# Altium PCB PCB1.PcbDoc (part 2 of 2)
Units mil, origin at the board's own origin, x right, y up, seen from the top; angles counter-clockwise.
Board outline 3937.01 x 3937.01 mil, 4 copper layers (L1, L2, L3, L4), stack 61.811 mil thick; 100 components, 172 nets, 741 pads, 303 vias.
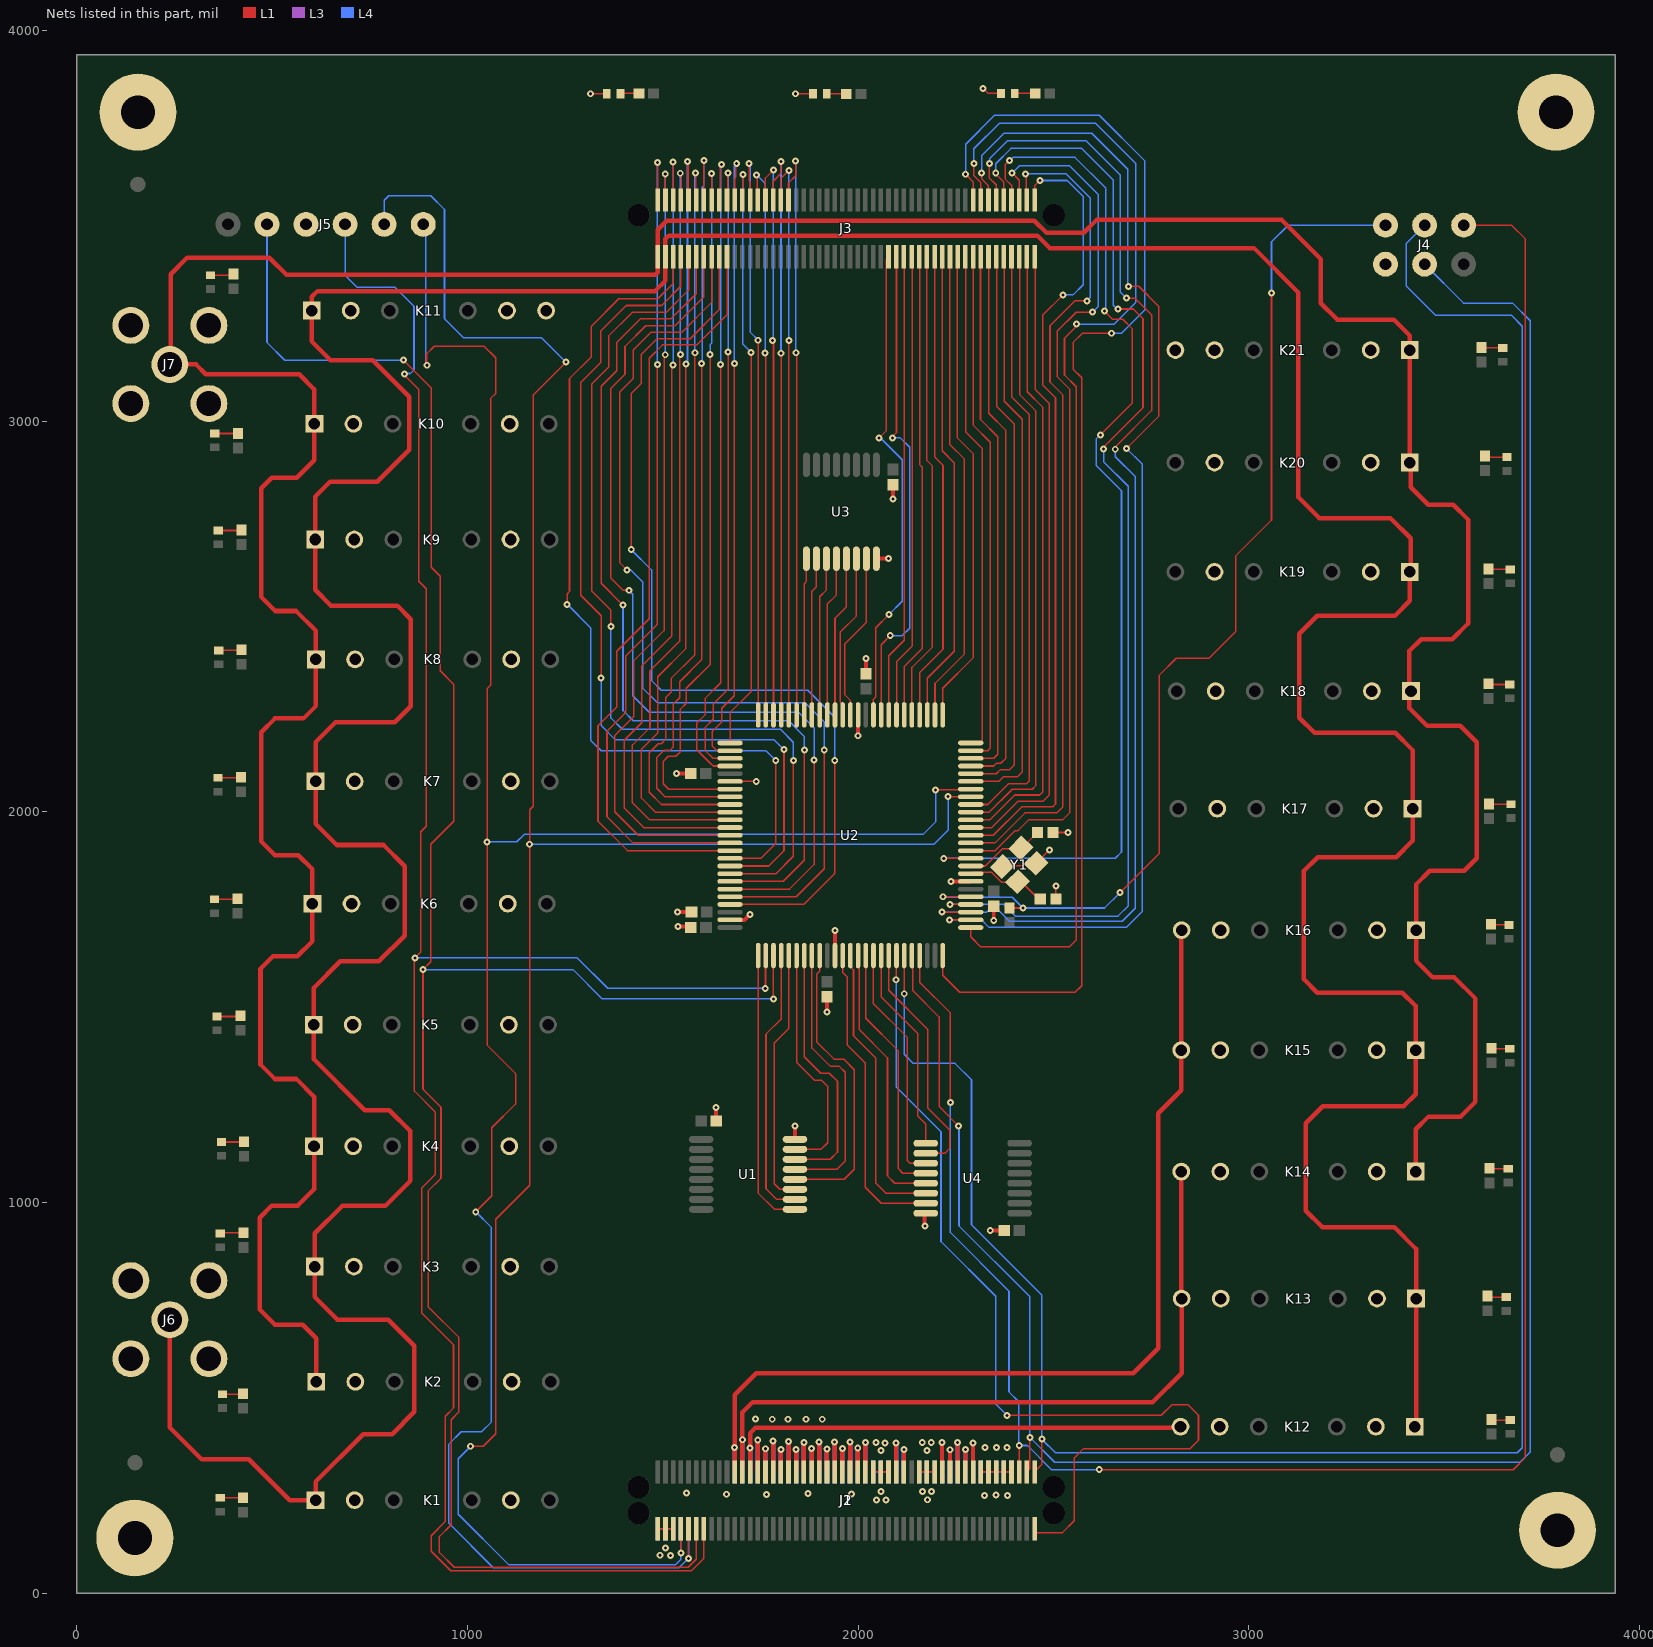
[diagram p4: the nets of this part, all layers, seen from the top]

## Via types
v1: diameter 17.72, hole 7.87, L1 to L4, 303 vias

## Nets (pads, with @x,y where several pads share a name; then routed paths per layer and width w, separated by ;. In a path a pad name is that pad's centre, name@x,y a point inside that pad or via, vN(x,y) a via of type N, cw(c..) or ccw(c..) an arc to the next point about the centre after c; other vN are vias at no path point) (continued)
GND: C1.1 C2.1 C3.1 C4.1 C5.1 C6.1 C7.1 C8.1 C9.1 C10.1 C11.1 D1.1 D2.1 D3.1 J1.2 J1.4 J1.6 J1.69 J1.71 J1.73 J1.85 J1.87 J1.89 J1.91 J1.93 J2.1 J2.3 J2.5 J2.70 J2.72 J2.74 J2.86 J2.88 J2.90 J2.92 J2.94 J4.6 J5.3 J6.2 J6.3 J6.4 J6.5 J7.2 J7.3 J7.4 J7.5 K1.5 K1.6 K2.5 K2.6 K3.5 K3.6 K4.5 K4.6 K5.5 K5.6 K6.5 K6.6 K7.5 K7.6 K8.5 K8.6 K9.5 K9.6 K10.5 K10.6 K11.4 K11.5 K11.6 K12.5 K12.6 K13.5 K13.6 K14.5 K14.6 K15.5 K15.6 K16.5 K16.6 K17.5 K17.6 K18.5 K18.6 K19.5 K19.6 K20.5 K20.6 K21.4 K21.5 K21.6 MH1.1 MH2.1 MH3.1 MH4.1 U1.8 U2.11 U2.32 U2.62 U2.81 U2.99 U3.8 U4.8 Y1.2 Y1.4 | length 1387.3
  L1 w4: v1(1315,3838) D1.1@1356,3838 ; J1.2@1486.97,164.84 J1.4@1506.65,164.84 J1.6@1526.34,164.84 ; C7.1@1636,1210 C7.1@1637,1209 ; U2.81@1671.93,2077.8 v1(1739,2077.8) ; v1(1839,3838) D2.1@1884.38,3838 ; J1.69@2156.26,310.51 J1.71@2175.94,310.51 J1.73@2195.63,310.51 ; v1(2171,940) 2172.92,941.92 v1@2172.92,947.08 ; J1.85@2313.74,310.51 J1.87@2333.43,310.51 J1.89@2353.11,310.51 J1.91@2372.8,310.51 J1.93@2392.48,310.51 ; v1(2319,3852) 2332,3839 D3.1@2365.57,3839 ; Y1.4@2369.03,1859.97 2370.42,1861.37 2420.57,1861.37 2427.53,1868.33 Y1.2@2455.33,1868.33 v1(2489.15,1902.15) ; C11.1@2499.16,1947 v1(2537,1947) ; v1(2506,1810) 2506.16,1809.84 C10.1@2506.16,1777
  L1 w10: v1(1535,2098) C5.1@1571,2098 ; v1(1537,1744) C3.1@1573.42,1744 ; v1(1539,1706) 1569.71,1706 C4.1@1571.71,1704 ; C7.1@1636,1210 v1(1636,1243) ; U2.99@1671.93,1723.46 1708.46,1723.46 1722,1737 v1(1723,1737) ; U1.8@1838.08,1161.57 v1(1838.08,1195.92) ; v1(1920,1488) C2.1@1920,1526.42 ; U2.11@1940.63,1631.93 v1(1940.63,1695.63) ; v1(1999.68,2194.68) U2.62@1999.68,2248.07 ; C6.1@2020,2353.58 v1(2020,2392) ; U3.8@2046.57,2647.92 v1(2077.92,2647.92) ; v1(2089,2801) C8.1@2089,2837.42 ; v1(2171,940) 2170,941 2170,968.87 2172.92,971.79 U4.8@2172.92,972.43 ; v1(2237.11,1821.89) U2.32@2288.07,1821.89 ; v1(2338,928) C9.1@2374,928 ; v1(2347,1721.58) C1.1@2347,1758
  L4 w4: J2.1@1486.97,164.84 J2.3@1506.65,164.84 J2.5@1526.34,164.84 ; J2.70@2156.26,310.51 J2.72@2175.94,310.51 J2.74@2195.63,310.51 ; J2.86@2313.74,310.51 J2.88@2333.43,310.51 J2.90@2353.11,310.51 J2.92@2372.8,310.51 J2.94@2392.48,310.51
  other v1: 1520,96 1493,97 1507,116 2177,239 2323,250 2382,250 2353,251 1765,252 1663,253 1983,254 1872,255 1560,256 2165,260 2188,260 2176,365 2325,373 2354,373 2381,373 2164,385 2187,385 1780,445 1820,445 1866,445 1908,445 1737,446
GPIO1: J3.20 U2.90 | length 2002.6
  L1 w4: J3.20@1665,3420.75 1665,3273 1587,3195 1499,3195 1465,3161 1465,2494 1382,2411 1382,2268 1334,2220 1334,1976 1409.37,1900.63 U2.90@1671.93,1900.63
GPIO2: J3.18 U2.97 | length 2458.3
  L1 w4: v1(1419,2671) 1419,3071 1445,3097 1445,3171 1485,3211 1570,3211 1644.45,3285.45 J3.18@1644.45,3420.75 ; U2.97@1671.93,1762.83 1860.83,1762.83 1940,1842 v1(1940,2131)
  L4 w4: v1(1419,2671) 1471,2619 1471,2336 1496,2311 1871,2311 1940,2242 v1(1940,2131)
GPIO3: J3.16 U2.96 | length 2424.9
  L1 w4: v1(1408,2619) 1390,2637 1390,3075 1424,3109 1424,3182 1469,3227 1548,3227 1624.76,3303.76 J3.16@1624.76,3420.75 ; U2.96@1671.93,1782.52 1841.52,1782.52 1913,1854 v1(1913,2158)
  L4 w4: v1(1408,2619) 1418,2619 1448,2589 1448,2317 1486,2279 1864,2279 1913,2230 v1(1913,2158)
GPIO4: J3.14 U2.95 | length 2387.3
  L1 w4: v1(1413,2567) 1398,2567 1367,2598 1367,3084 1403,3120 1403,3191 1456,3244 1531,3244 1605.08,3318.08 J3.14@1605.08,3420.75 ; U2.95@1671.93,1802.2 1824.2,1802.2 1887,1865 v1(1887,2133)
  L4 w4: v1(1413,2567) 1423,2557 1423,2297 1465,2255 1847,2255 1887,2215 v1(1887,2133)
GPIO5: J3.12 U2.94 | length 2352.3
  L1 w4: v1(1398,2529) 1342,2585 1342,3089 1382,3129 1382,3201 1443,3262 1521,3262 1585.39,3326.39 J3.12@1585.39,3420.75 ; U2.94@1671.93,1821.89 1807.89,1821.89 1862,1876 v1(1862,2158)
  L4 w4: v1(1398,2529) 1398,2259 1424,2233 1822,2233 1862,2193 v1(1862,2158)
GPIO6: J3.10 U2.93 | length 2319.8
  L1 w4: v1(1367,2474) 1367,2516 1318,2565 1318,3095 1361,3138 1361,3218 1422,3279 1509,3279 1565.71,3335.71 J3.10@1565.71,3420.75 ; U2.93@1671.93,1841.57 1789.57,1841.57 1834,1886 v1(1834,2131)
  L4 w4: v1(1367,2474) 1367,2240 1396,2211 1801,2211 1834,2178 v1(1834,2131)
GPIO7: J3.8 U2.92 | length 2287.4
  L1 w4: v1(1342,2342) 1342,2502 1290,2554 1290,3099 1341,3150 1341,3231 1406,3296 1497,3296 1546.02,3345.02 J3.8@1546.02,3420.75 ; U2.92@1671.93,1861.26 1771.26,1861.26 1810,1900 v1(1810,2159)
  L4 w4: v1(1342,2342) 1342,2221 1379,2184 1785,2184 v1(1810,2159)
GPIO8: J3.6 U2.91 | length 2273.9
  L1 w4: v1(1255,2531) 1255,2558 1261,2564 1261,3109 1317,3165 1317,3243 1387,3313 1487,3313 1526.34,3352.34 J3.6@1526.34,3420.75 ; U2.91@1671.93,1880.94 1750.94,1880.94 1789,1919 v1(1789,2131)
  L4 w4: v1(1255,2531) 1315,2471 1315,2183 1342,2156 1764,2156 v1(1789,2131)
GPIO9: J3.1 U2.89 | length 2167
  L1 w4: v1(1486,3145) 1486,2480 1405,2399 1405,2254 1357,2206 1357,1987 1423.69,1920.31 U2.89@1671.93,1920.31 ; v1(1486,3662) 1486.48,3661.52 1486.48,3566.9 J3.1@1486.97,3566.42
  L4 w4: v1(1486,3145) v1(1486,3662)
GPIO10: J3.3 U2.88 | length 2074.5
  L1 w4: v1(1506,3170) 1503,3167 1503,2464 1425,2386 1425,2243 1377,2195 1377,2000 1437,1940 U2.88@1671.93,1940 ; v1(1506,3633) 1506.33,3632.67 1506.33,3566.74 J3.3@1506.65,3566.42
  L4 w4: v1(1506,3633) v1(1506,3170) v1@1507,3171
GPIO11: J3.5 U2.87 | length 2093.3
  L1 w4: v1(1526,3144) 1523,3141 1523,2450 1446,2373 1446,2228 1401,2183 1401,2010 1451.32,1959.68 U2.87@1671.93,1959.68 ; v1(1526,3663) 1526.17,3662.83 1526.17,3566.59 J3.5@1526.34,3566.42
  L4 w4: v1(1526,3144) v1(1526,3663)
GPIO12: J3.7 U2.86 | length 2000.2
  L1 w4: v1(1544.51,3634.49) 1547.01,3631.99 1547.01,3567.41 J3.7@1546.02,3566.42 ; v1(1545,3171) 1543.14,3169.14 1543.14,2437.14 1467,2361 1467,2216 1422,2171 1422,2023 1465.63,1979.37 U2.86@1671.93,1979.37
  L4 w4: v1(1544.51,3634.49) 1544.51,3171.49 v1(1545,3171)
GPIO13: J3.9 U2.85 | length 2021.5
  L1 w4: v1(1559,3146) 1559,2418 1487,2346 1487,2202 1445,2160 1445,2035 1480.94,1999.06 U2.85@1671.93,1999.06 ; v1(1563,3665) 1564.35,3663.65 1564.35,3567.77 J3.9@1565.71,3566.42
  L4 w4: v1(1559,3146) 1563,3150 1561.62,3151.38 1561.62,3152.34 1563,3153.71 v1(1563,3665)
GPIO14: J3.11 U2.84 | length 1930.8
  L1 w4: v1(1582,3175) 1582,2402 1521,2341 1521,2306 1507,2292 1507,2185 1496,2174 1488,2174 1465,2151 1465,2050 1496.26,2018.74 U2.84@1671.93,2018.74 ; v1(1584,3635) 1584.7,3634.3 1584.7,3567.11 J3.11@1585.39,3566.42
  L4 w4: v1@1584,3177 v1(1582,3175) 1582,3633 v1(1584,3635)
GPIO15: J3.13 U2.83 | length 1964
  L1 w4: v1(1599,3147) 1599,2389 1543,2333 1543,2292 1526,2275 1526,2165 1518,2157 1502,2157 1484,2139 1484,2060 1505.57,2038.43 U2.83@1671.93,2038.43 ; v1(1605,3667) v1(1605,3667) 1605.04,3566.46 J3.13@1605.08,3566.42
  L4 w4: v1(1599,3147) 1601,3149 1601,3599 1605,3603 v1(1605,3667)
GPIO16: J3.15 U2.82 | length 1868.9
  L1 w4: v1(1621,3171) 1621,2377 1560,2316 1560,2278 1545,2263 1545,2154 1533,2142 1514,2142 1501,2129 1501,2072 1515,2058 1628,2058 1628.11,2058.11 U2.82@1671.93,2058.11 ; J3.15@1624.76,3566.42 1624.88,3566.54 1624.88,3633.88 v1(1625,3634)
  L4 w4: v1(1621,3171) 1621,3196 1625,3200 v1(1625,3634)
GPIO17: J3.17 U2.79 | length 1719.2
  L1 w4: J3.17@1644.45,3566.42 1647.38,3569.34 1647.38,3654.38 v1(1650,3657) ; v1(1648,3145) 1648,2330 1608,2290 1608,2248 1587,2227 1587,2159 1619,2127 1628.83,2117.17 U2.79@1671.93,2117.17
  L4 w4: v1(1648,3145) 1648,3655 v1(1650,3657)
GPIO18: J3.19 U2.78 | length 1644.5
  L1 w4: J3.19@1664.13,3566.42 1665.57,3567.85 1665.57,3633.57 v1(1667,3635) ; v1(1667,3177) 1667,2314 1629,2276 1629,2237 1608,2216 1608,2157 1628.15,2136.85 U2.78@1671.93,2136.85
  L4 w4: v1(1667,3177) v1(1667,3635)
GPIO19: J3.21 U2.77 | length 1661.9
  L1 w4: U2.77@1671.93,2156.54 1670.96,2157.51 1637.49,2157.51 1626,2169 1626,2205 1651,2230 1651,2265 1683,2297 v1(1683,3148) ; J3.21@1683.82,3566.42 1683.82,3621.82 1687,3625 1687,3657 v1(1689,3659)
  L4 w4: v1(1683,3148) 1683,3653 v1(1689,3659)
GPIO20: J3.23 U2.76 | length 1551.1
  L1 w4: U2.76@1671.93,2176.22 1671.93,2253.93 1726,2308 v1(1726,3176) ; J3.23@1703.5,3566.42 1704.25,3567.17 1704.25,3630.25 v1(1705,3631)
  L4 w4: v1(1705,3631) 1705,3197 v1(1726,3176)
GPIO21: J3.25 U2.75 | length 1514.9
  L1 w4: v1(1720,3659) 1720.86,3658.14 1720.86,3615.14 1723.19,3612.81 J3.25@1723.19,3566.42 ; U2.75@1743.78,2248.07 1743.78,3206.78 v1(1744,3207)
  L4 w4: v1(1720,3659) 1720,3655.29 1724,3651.29 1724,3227 v1(1744,3207)
GPIO22: J3.27 U2.74 | length 1458.1
  L1 w4: v1(1740,3630) 1741.44,3628.56 1741.44,3567.85 J3.27@1742.87,3566.42 ; v1(1761,3174) 1763.46,3171.54 U2.74@1763.46,2248.07
  L4 w4: v1(1740,3630) 1762,3608 1762,3177 1763,3176 v1(1761,3174)
GPIO23: J3.29 U2.73 | length 1482.5
  L1 w4: J3.29@1762.56,3566.42 1762.56,3622.56 v1(1783,3643) ; v1(1781,3206) 1783.15,3203.85 U2.73@1783.15,2248.07
  L4 w4: v1(1781,3206) 1783,3208 1782,3209 1782,3642 v1(1783,3643)
GPIO24: J3.31 U2.72 | length 1524.4
  L1 w4: J3.31@1782.24,3566.42 1782.24,3614.24 1802,3634 v1(1802,3665) ; U2.72@1802.83,2248.07 v1(1802.83,3173.83)
  L4 w4: v1(1802,3665) 1802.42,3664.58 1802.42,3175.09 1802,3174.67 v1(1802.83,3173.83)
GPIO25: J3.33 U2.71 | length 1478.2
  L1 w4: J3.33@1801.93,3566.42 1801.93,3620.89 1820.52,3639.48 1822.52,3639.52 v1(1822.52,3641.48) ; U2.71@1822.52,2248.07 v1(1822.52,3206.48)
  L4 w4: v1(1822.52,3206.48) v1(1822.52,3641.48)
GPIO26: J3.35 U2.70 | length 1526.5
  L1 w4: J3.35@1821.61,3566.42 1821.61,3609.61 1840,3628 v1(1840,3666) ; v1(1841,3175) 1842.2,3173.8 U2.70@1842.2,2248.07
  L4 w4: v1(1840,3666) 1840.5,3665.5 1840.5,3176.5 1840,3176 v1(1841,3175)
GPIO27: J3.62 U2.60 | length 1240.9
  L1 w4: U2.60@2039.06,2248.07 2039.06,2288.06 2045,2294 2045,2471 v1(2079,2505) ; v1(2053,2957) 2072.14,2976.14 2072.14,3414.89 J3.62@2078,3420.75
  L4 w4: v1(2053,2957) 2056.71,2957 2061.22,2952.49 2061.51,2952.49 2113,2901 2113,2539 v1(2079,2505)
GPIO28: J3.64 U2.59 | length 1255.3
  L1 w4: U2.59@2058.74,2248.07 2058.74,2427.74 v1(2082,2451) ; v1(2088,2957) 2088,2960.71 2098,2970.71 J3.64@2098,3420.75
  L4 w4: v1(2082,2451) 2113,2451 2132,2470 2132,2933 2108,2957 v1(2088,2957)
GPIO29: J3.66 U2.58 | length 1189.1
  L1 w4: U2.58@2078.43,2248.07 2078.43,2399.43 2118,2439 J3.66@2118,3420.75
GPIO30: J3.68 U2.57 | length 1189.2
  L1 w4: U2.57@2098.11,2248.07 2098.11,2384.11 2138,2424 J3.68@2138,3420.75
GPIO31: J3.70 U2.56 | length 1194.7
  L1 w4: U2.56@2117.8,2248.07 2117.8,2371.8 2164,2418 2164,2882 2157,2889 J3.70@2157,3420.75
GPIO32: J3.72 U2.55 | length 1200.2
  L1 w4: U2.55@2137.48,2248.07 2137.48,2369.48 2190,2422 2190,2885 2176,2899 J3.72@2176,3420.75
GPIO33: J3.74 U2.54 | length 1206.2
  L1 w4: U2.54@2157.17,2248.07 2157.17,2356.17 2217,2416 2217,2887 2196,2908 J3.74@2196,3420.75
GPIO34: J3.76 U2.53 | length 1214.2
  L1 w4: U2.53@2176.85,2248.07 2176.85,2341.85 2246,2411 2246,2893 2215,2924 J3.76@2215,3420.75
GPIO35: J3.78 U2.52 | length 1219.7
  L1 w4: U2.52@2196.54,2248.07 2196.54,2328.54 2272,2404 2272,2903 2234,2941 J3.78@2234,3420.75
GPIO36: J3.80 U2.51 | length 1222.3
  L1 w4: U2.51@2216.22,2248.07 2216.22,2316.22 2295,2395 2295,2916 2254,2957 J3.80@2254,3420.75
GPIO37: J3.82 U2.50 | length 1289.1
  L1 w4: J3.82@2275,3420.75 2275,2972 2318,2929 2318,2181.69 2312.53,2176.22 U2.50@2288.07,2176.22
GPIO38: J3.84 U2.49 | length 1328.6
  L1 w4: U2.49@2288.07,2156.54 2331.54,2156.54 2338,2163 2338,2946 2294,2990 J3.84@2294,3420.75
GPIO39: J3.86 U2.48 | length 1365.1
  L1 w4: U2.48@2288.07,2136.85 2346.85,2136.85 2357,2147 2357,2960 2313,3004 J3.86@2313,3420.75
GPIO40: J3.88 U2.47 | length 1400.1
  L1 w4: U2.47@2288.07,2117.17 2347.17,2117.17 2354,2124 2365,2124 2378,2137 2378,2976 2334,3020 J3.88@2334,3420.75
GPIO41: J3.90 U2.46 | length 1439.8
  L1 w4: U2.46@2288.07,2097.48 2353.48,2097.48 2364,2108 2388,2108 2399,2119 2399,2993 2355,3037 J3.90@2355,3420.75
GPIO42: J3.92 U2.45 | length 1479.8
  L1 w4: U2.45@2288.07,2077.8 2359.8,2077.8 2372,2090 2408,2090 2420,2102 2420,3005 2374,3051 J3.92@2374,3420.75
GPIO43: J3.94 U2.42 | length 1535.3
  L1 w4: U2.42@2288.07,2018.74 2331.74,2018.74 2385,2072 2431,2072 2438,2079 2438,3017 2393,3062 J3.94@2393,3420.75
GPIO44: J3.96 U2.41 | length 1565.9
  L1 w4: U2.41@2288.07,1999.06 2335.06,1999.06 2394,2058 2445.5,2058 2455,2067.5 2455,3026 2413,3068 J3.96@2413,3420.75
GPIO45: J3.98 U2.40 | length 1600.1
  L1 w4: U2.40@2288.07,1979.37 2337.37,1979.37 2401,2043 2465,2043 2472,2050 2472,3036 2433,3075 J3.98@2433,3420.75
GPIO46: J3.100 U2.39 | length 1628.1
  L1 w4: U2.39@2288.07,1959.68 2341.68,1959.68 2409,2027 2473,2027 2489,2043 2489,3045 2453,3081 J3.100@2453,3420.75
GPIO47: J3.99 U2.38 | length 2060.2
  L1 w4: U2.38@2288.07,1940 2346,1940 2419,2013 2498,2013 2505,2020 2505,3060 2472,3093 2472,3271 v1(2524,3323) ; J3.99@2451.54,3566.42 2451.54,3602.54 v1(2465,3616)
  L4 w4: v1(2465,3616) 2535,3616 2576,3575 2576,3349 2550,3323 v1(2524,3323)
GPIO48: J3.97 U2.37 | length 2166.3
  L1 w4: U2.37@2288.07,1920.31 2350.31,1920.31 2427,1997 2508,1997 2524,2013 2524,3067 2491,3100 2491,3244 2555,3308 v1(2585.34,3308) ; v1(2428,3633) 2429.93,3631.07 2429.93,3568.34 J3.97@2431.85,3566.42
  L4 w4: v1(2428,3633) 2532,3633 2594,3571 2594,3317.04 2585.34,3308.39 v1(2585.34,3308)
GPIO49: J3.95 U2.36 | length 2292.4
  L1 w4: U2.36@2288.07,1900.63 2350.63,1900.63 2402,1952 2409,1952 2437,1980 2524,1980 2541,1997 2541,3082 2509,3114 2509,3230 2558,3279 v1(2600,3279) ; v1(2394,3635) 2412.17,3616.83 J3.95@2412.17,3566.42
  L4 w4: v1(2394,3635) 2413,3654 2541,3654 2614,3581 2614,3293 v1(2600,3279)
GPIO50: J3.93 U2.35 | length 2735.9
  L1 w4: v1(2219.06,1880.94) U2.35@2288.07,1880.94 ; v1(2387,3667) 2376,3656 2376,3620 2392.48,3603.52 J3.93@2392.48,3566.42 ; v1(2620,2965) 2701,3046 2701,3237 2677,3261 2651,3261 v1(2630,3282)
  L4 w4: v1(2219.06,1880.94) 2657.94,1880.94 2674,1897 2674,2822 2609,2887 2609,2954 v1(2620,2965) ; v1(2387,3667) 2388.2,3667 2396.2,3675 2555,3675 2634,3596 2634,3289.71 2630,3285.71 v1(2630,3282)
GPIO51: J3.91 U2.29 | length 2966
  L1 w4: v1(2234.83,1762.83) U2.29@2288.07,1762.83 ; v1(2352,3635) 2352,3632.69 2372.8,3611.89 J3.91@2372.8,3566.42 ; v1(2628,2929) 2628,2932.71 2632.51,2937.22 2632.51,2937.51 2729,3034 2729,3262 2704,3287 v1(2665,3287)
  L4 w4: v1(2234.83,1762.83) 2372.17,1762.83 2402,1733 2665,1733 2691,1759 2691,2833 2628,2896 v1(2628,2929) ; v1(2352,3635) 2352,3659 2391,3698 2572,3698 2653,3617 2653,3296.7 2662.7,3287 v1(2665,3287)
GPIO52: J3.89 U2.28 | length 3083.5
  L1 w4: v1(2214.15,1743.15) U2.28@2288.07,1743.15 ; v1(2336,3660) 2336,3622 2353.11,3604.89 J3.89@2353.11,3566.42 ; v1(2658,2928) 2660.62,2930.62 2660.62,2936.62 2751,3027 2751,3272 2708,3315 v1(2686.24,3315)
  L4 w4: v1(2214.15,1743.15) 2214.3,1743 2214.45,1743.15 2328.15,1743.15 2335,1750 2357,1750 2387,1720 2676,1720 2709,1753 2709,2858 2658,2909 v1(2658,2928) ; v1(2336,3660) 2336.51,3660.51 2336.51,3672.51 2382,3718 2583,3718 2671,3630 2671,3330.24 v1(2686.24,3315)
GPIO53: J3.87 U2.27 | length 3128.4
  L1 w4: v1(2233.46,1723.46) U2.27@2288.07,1723.46 ; v1(2316,3635) 2316,3620 2333.43,3602.57 J3.87@2333.43,3566.42 ; v1(2687,2930) 2769,3012 2769,3294 2718,3345 v1(2691.66,3345)
  L4 w4: v1(2233.46,1723.46) 2315.54,1723.46 2335,1704 2686,1704 2727,1745 2727,2890 v1(2687,2930) ; v1(2316,3635) 2316,3680 2373,3737 2598,3737 2690,3645 2690,3346.66 v1(2691.66,3345)
GPIO54: J3.85 U2.26 | length 3066.2
  L1 w4: U2.26@2288.07,1703.78 2288.07,1679.93 2314,1654 2540,1654 2558,1672 2558,3088 2528,3118 2528,3212 2559,3243 v1(2559,3248.5) ; v1(2296,3660) 2296,3628.69 2313.74,3610.95 J3.85@2313.74,3566.42
  L4 w4: v1(2296,3660) 2296,3697 2362,3763 2607,3763 2710,3660 2710,3303 2655.5,3248.5 v1(2559,3248.5)
GPIO55: J3.83 U2.25 | length 3374.6
  L1 w4: U2.25@2216.22,1631.93 2216.22,1581.78 2260,1538 2555,1538 2572,1555 2572,3111 2550,3133 2550,3201 2574,3225 v1(2648,3225) ; v1(2275,3632) 2294.06,3612.94 J3.83@2294.06,3566.42
  L4 w4: v1(2275,3632) 2275,3709 2349,3783 2617,3783 2734,3666 2734,3285 2674,3225 v1(2648,3225)
H: J1.21 J2.22 K15.4 K16.4 | length 2488
  L1 w4: K15.4@2827,1390 K15.4@2827.5,1390.5 ; K16.4@2827.5,1696.5 K16.4@2828,1697
  L1 w11.55: J1.21@1683.82,310.51 v1(1683.82,372.82) 1683.82,507.82 1739,563 2704,563 2768,627 2768,1228 2827,1287 K15.4@2827,1390 ; K15.4@2827.5,1390.5 K16.4@2827.5,1696.5
  L4 w11.55: J2.22@1683.82,310.51 v1(1683.82,372.82)
I: J1.23 J2.24 K13.4 K14.4 | length 1916.5
  L1 w4: K14.4@2827,1079 K14.4@2827.5,1078.5 ; K13.4@2827.5,754.5 K13.4@2828,754
  L1 w11.55: J1.23@1703.5,310.51 v1(1703.5,392.5) 1703.5,462.5 1730,489 2754,489 2828,563 K13.4@2828,754 ; K13.4@2827.5,754.5 K14.4@2827.5,1078.5
  L4 w11.55: J2.24@1703.5,310.51 v1(1703.5,392.5)
J: J1.25 J2.26 K12.4 | length 1277.2
  L1 w4: K12.4@2819,420 K12.4@2825,426
  L1 w11.55: J1.25@1723.19,310.51 v1(1723.19,371.81) 1723.19,409.19 1737,423 2822,423 K12.4@2825,426
  L4 w11.55: J2.26@1723.19,310.51 v1(1723.19,371.81)
K: J1.27 J2.28 | length 162.7
  L1 w11.55: J1.27@1742.87,310.51 v1(1742.87,391.87)
  L4 w11.55: J2.28@1742.87,310.51 v1(1742.87,391.87)
L: J1.29 J2.30 | length 117.9
  L1 w11.55: J1.29@1762.56,310.51 v1(1762.56,369.44)
  L4 w11.55: J2.30@1762.56,310.51 v1(1762.56,369.44)
M: J1.31 J2.32 | length 160.2
  L1 w4: J1.31@1781,311.76 J1.31@1782.24,310.51
  L1 w11.55: J1.31@1782.24,310.51 v1(1782.24,389.76)
  L4 w11.55: J2.32@1782.24,310.51 v1(1782.24,389.76)
MISO: J1.95 J4.1 U2.22 | length 6053.2
  L1 w4: U2.22@2157.17,1631.93 2157.17,1563.83 2236,1485 v1(2236,1256) ; J1.95@2412.17,310.51 v1(2412.17,377.83) ; v1(2617,316) 3677,316 3708,347 3708,3466 3672.31,3501.69 J4.1@3549.92,3501.69
  L4 w4: v1(2236,1256) 2236,923 2386,773 2386,515 2411,490 2411,379 v1(2412.17,377.83) 2433.17,377.83 2495,316 v1(2617,316)
MOSI: J1.97 J4.4 U2.21 | length 5993
  L1 w4: U2.21@2137.48,1631.93 2138.97,1630.43 2138.97,1600.13 2140,1599.11 2140,1542 2207,1475 2207,1246 v1(2257,1196) ; J1.97@2431.85,310.51 2439.63,318.29 v1(2439.63,398.63)
  L4 w4: v1@2258,1196 2258,940 2439.63,758.37 2439.63,398.37 2503,335 3694,335 3720,361 3720,3257 3674.72,3302.28 3549.33,3302.28 J4.4@3449.92,3401.69
N: J1.33 J2.34 | length 114.8
  L1 w11.55: J1.33@1801.93,310.51 v1(1801.93,367.93)
  L4 w11.55: J2.34@1801.93,310.51 v1(1801.93,367.93)
NetC10_2: C10.2 U2.33 Y1.1 | length 198.2
  L1 w4: U2.33@2288.07,1841.57 2291.35,1844.86 2341.57,1844.86 2366.97,1819.46 2418.54,1819.46 C10.2@2458,1780
NetC11_2: C11.2 U2.34 Y1.3 | length 206.4
  L1 w4: U2.34@2288.07,1861.26 2325.26,1861.26 2369.76,1905.76 2414.78,1905.76 2416.18,1907.15 2419.15,1907.15 C11.2@2459,1947
NetD1_2: D1.2 R2.2 | length 47.6
  L1 w4: D1.2@1391.43,3838 1392.43,3839 R2.2@1438.6,3839
NetD2_2: D2.2 R3.2 | length 49.8
  L1 w4: D2.2@1919.82,3838 R3.2@1969.6,3838
NetD3_2: D3.2 R4.2 | length 52
  L1 w4: D3.2@2401,3839 R4.2@2453,3839
NetD4_2: D4.2 R5.2 | length 58.2
  L1 w4: D4.2@367,244 424.6,244 R5.2@425,244.4
NetD5_2: D5.2 R6.2 | length 60.8
  L1 w4: D5.2@359,1476 417,1476 R6.2@419,1478
NetD6_2: D6.2 R7.2 | length 59.8
  L1 w4: D6.2@363,2413 420,2413 R7.2@422,2415
NetD7_2: D7.2 R8.2 | length 48.6
  L1 w4: R8.2@3621,444.4 3622.4,443 D7.2@3669,443
NetD8_2: D8.2 R9.2 | length 47.6
  L1 w4: R9.2@3621,1395 3622.57,1393.43 D8.2@3668,1393.43
NetD9_2: D9.2 R10.2 | length 55.5
  L1 w4: R10.2@3614,2621.7 3615.27,2620.43 D9.2@3669,2620.43
NetD10_2: D10.2 R11.2 | length 52.4
  L1 w4: D10.2@373,509.43 424.03,509.43 R11.2@425,510.4
NetD11_2: D11.2 R12.2 | length 59.7
  L1 w4: D11.2@352,1776 409.3,1776 R12.2@411,1777.7
NetD12_2: D12.2 R13.2 | length 59.6
  L1 w4: D12.2@362,2720 419.6,2720 R13.2@421,2721.4
NetD13_2: D13.2 R14.2 | length 49.1
  L1 w4: R14.2@3611,760.4 3613.59,757.82 D13.2@3659,757.82
NetD14_2: D14.2 R15.2 | length 46.6
  L1 w4: R15.2@3620,1712 3621.57,1710.43 D14.2@3666,1710.43
NetD15_2: D15.2 R16.2 | length 57.1
  L1 w4: R16.2@3605,2910.7 3607.7,2908 D15.2@3661,2908
NetD16_2: D16.2 R17.2 | length 59.7
  L1 w4: D16.2@367,920.7 368.7,922.4 R17.2@426,922.4
NetD17_2: D17.2 R18.2 | length 59.7
  L1 w4: D17.2@361,2087 418.3,2087 R18.2@420,2088.7
NetD18_2: D18.2 R19.2 | length 59
  L1 w4: D18.2@353,2968.43 R19.2@412,2968.4
NetD19_2: D19.2 R20.2 | length 48.4
  L1 w4: R20.2@3616,1087.4 3616.97,1086.43 D19.2@3664,1086.43
NetD20_2: D20.2 R21.2 | length 56.2
  L1 w4: R21.2@3615,2020 3615.57,2019.43 D20.2@3671,2019.43
NetD21_2: D21.2 R22.2 | length 55.5
  L1 w4: R22.2@3595,3188.7 3596.27,3187.43 D21.2@3650,3187.43
NetD22_2: D22.2 R23.2 | length 58.2
  L1 w4: D22.2@370,1154.82 427.41,1154.82 R23.2@428,1155.4
NetD23_2: D23.2 R24.2 | length 60.2
  L1 w4: D23.2@342,3373.52 398.12,3373.52 R24.2@401,3376.4
NetD24_2: D24.2 R25.2 | length 55.8
  L1 w4: R25.2@3613,2327.7 3614.88,2325.82 D24.2@3668,2325.82
O: J1.35 J2.36 | length 155.7
  L1 w11.55: J1.35@1821.61,310.51 v1(1821.61,388.39)
  L4 w11.55: J2.36@1821.61,310.51 v1(1821.61,388.39)
OSC1: J3.4 J6.1 K1.1 K3.1 K5.1 K7.1 K9.1 K11.1 K12.1 K13.1 K15.1 K17.1 K19.1 | length 12762.3
  L1 w4: J6.1@238,670 253,685 J6.1@238,700 ; K12.1@3425,426 K12.1@3428,429
  L1 w11.55: J6.1@238,670 238,424 319,343 440,343 545,238 K1.1@611,238 611,285 733,407 807,407 864,464 864,633 797,700 667,700 609,758 K3.1@609,836 609,921 679,991 789,991 853,1055 853,1183 800,1236 737,1236 606,1367 K5.1@606,1455 606,1549 674,1617 773,1617 839,1683 839,1861 785,1915 665,1915 611,1969 K7.1@611,2078 611,2178 662,2229 814,2229 855,2270 855,2493 820,2528 650,2528 610,2568 K9.1@610,2697 610,2807 648,2845 769,2845 851,2927 851,3062 757,3156 649,3156 601,3204 K11.1@601,3283 601,3318 616,3333 1480,3333 1506.65,3359.65 J3.4@1506.65,3420.75 1506.65,3466.65 1515,3475 2458,3475 2490,3443 3013,3443 3127,3329 3127,2805 3180,2752 3362,2752 3414,2700 3414,2616 K19.1@3412,2614 3412,2540 3374,2502 3175,2502 3129,2456 3129,2241 3168,2202 3375,2202 3419,2158 K17.1@3419,2008 3419,1926 3377,1884 3176,1884 3141,1849 3141,1571 3175,1537 3393,1537 3427,1503 K15.1@3427,1390 3427,1277 3396,1246 3189,1246 3146,1203 3146,979 3188,937 3372,937 3428,881 K13.1@3428,754 K12.1@3428,429
OSC2: J3.2 J7.1 K2.1 K4.1 K6.1 K8.1 K10.1 K14.1 K16.1 K18.1 K20.1 K21.1 | length 10270.9
  L1 w4: J7.1@238,3145 243,3150 J7.1@238,3155 ; K20.1@3406,2899 K20.1@3412,2905 ; K20.1@3412,2894 3419,2887 K20.1@3414,2882
  L1 w11.55: K2.1@613,541 613,652 578,687 507,687 468,726 468,961 499,992 565,992 607,1034 K4.1@607,1144 607,1271 562,1316 507,1316 470,1353 470,1598 502,1630 564,1630 603,1669 K6.1@603,1765 603,1853 567,1889 507,1889 472,1924 472,2204 507,2239 580,2239 612,2271 K8.1@612,2390 612,2463 561,2514 508,2514 472,2550 472,2828 499,2855 563,2855 608,2900 K10.1@608,2993 608,3081 569,3120 330,3120 305,3145 243,3145 J7.1@238,3145 240,3147 240,3155 240,3376 282,3418 492.77,3418 536.38,3374.38 1480.2,3374.38 1486.97,3381.15 J3.2@1486.97,3420.75 1486.97,3489.97 1510,3513 2451,3513 2482,3482 2577,3482 2610,3515 3084,3515 3184,3415 3184,3302 3226,3260 3371,3260 3412,3219 K21.1@3412,3182 K20.1@3412,2905 ; K20.1@3414,2882 3414,2831 3459,2786 3523,2786 3561,2748 3561,2482 3521,2442 3441,2442 3411,2412 3411,2313 3411,2265 3456,2220 3541,2220 3583,2178 3583,1881 3551,1849 3463,1849 3428,1814 K16.1@3428,1697 3428,1619 3471,1576 3526,1576 3580,1522 3580,1258 3542,1220 3460,1220 3427,1187 K14.1@3427,1079
P: J1.37 J2.38 | length 113.6
  L1 w11.55: J1.37@1841.3,310.51 v1(1841.3,367.3)
  L4 w11.55: J2.38@1841.3,310.51 v1(1841.3,367.3)
Q: J1.39 J2.40 | length 150.9
  L1 w11.55: J1.39@1860.98,310.51 v1(1860.98,385.98)
  L4 w11.55: J2.40@1860.98,310.51 v1(1860.98,385.98)
R: J1.41 J2.42 | length 119.7
  L1 w11.55: J1.41@1880.62,310.56 J1.41@1880.67,310.51 v1(1880.67,370.33)
  L4 w11.55: J2.42@1880.67,310.51 v1(1880.67,370.33)
RELAY0: U1.1 U2.1 | length 719.3
  L1 w4: U2.1@1743.78,1631.93 1743.78,1024.22 1785.57,982.43 U1.1@1838.08,982.43
RELAY1: U1.2 U2.4 | length 698.3
  L1 w4: U2.4@1802.83,1631.93 1802.83,1469.83 1764,1431 1764,1035 1790.98,1008.02 U1.2@1838.08,1008.02
RELAY2: U1.3 U2.5 | length 658.5
  L1 w4: U2.5@1822.52,1631.93 1822.52,1445.52 1785,1408 1785,1048 1799.39,1033.61 U1.3@1838.08,1033.61
RELAY3: U1.4 U2.9 | length 767
  L1 w4: U1.4@1838.08,1059.2 1964.2,1059.2 1990,1085 1990,1340 1963,1367 1938,1367 1894,1411 1894,1585 1901.26,1592.26 U2.9@1901.26,1631.93
RELAY4: U1.5 U2.8 | length 712.5
  L1 w4: U1.5@1838.08,1084.8 1945.8,1084.8 1967,1106 1967,1333 1951,1349 1928,1349 1881.57,1395.43 U2.8@1881.57,1631.93
RELAY5: U1.6 U2.7 | length 667.7
  L1 w4: U1.6@1838.08,1110.39 1928.39,1110.39 1947,1129 1947,1310 1926,1331 1904,1331 1861.89,1373.11 U2.7@1861.89,1631.93
RELAY6: U1.7 U2.6 | length 613.5
  L1 w4: U1.7@1838.08,1135.98 1904.98,1135.98 1922,1153 1922,1297 1906,1313 1888,1313 1842.2,1358.8 U2.6@1842.2,1631.93
RELAY7: U2.69 U3.1 | length 402.1
  L1 w4: U2.69@1861.89,2248.07 1861.89,2583.89 1867.43,2589.43 U3.1@1867.43,2647.92
RELAY8: U2.68 U3.2 | length 404.6
  L1 w4: U2.68@1881.57,2248.07 1881.57,2564.57 1893.02,2576.02 U3.2@1893.02,2647.92
RELAY9: U2.67 U3.3 | length 407
  L1 w4: U2.67@1901.26,2248.07 1901.26,2550.26 1918.61,2567.61 U3.3@1918.61,2647.92
RELAY10: U2.66 U3.4 | length 409.5
  L1 w4: U2.66@1920.94,2248.07 1920.94,2531.94 1944.2,2555.2 U3.4@1944.2,2647.92
RELAY11: U2.65 U3.5 | length 411.9
  L1 w4: U2.65@1940.63,2248.07 1940.63,2495.63 1969.8,2524.8 U3.5@1969.8,2647.92
RELAY12: U2.64 U3.6 | length 419.6
  L1 w4: U2.64@1960.31,2248.07 1960.31,2274.58 1954,2280.89 1954,2460 1995.39,2501.39 U3.6@1995.39,2647.92
RELAY13: U2.63 U3.7 | length 429.2
  L1 w4: U2.63@1980,2248.07 1980,2285 1965,2300 1965,2429 2020.98,2484.98 U3.7@2020.98,2647.92
RELAY14: U2.17 U4.1 | length 527.7
  L1 w4: U2.17@2058.74,1631.93 2059,1631.67 2059,1526 2152,1433 2152,1222 2172.92,1201.08 U4.1@2172.92,1151.57
RELAY15: U2.18 U4.2 | length 624.8
  L1 w4: U2.18@2078.43,1631.93 2078,1631.5 2078,1543 2178,1443 2178,1242 2234,1186 2234,1138 2221.98,1125.98 U4.2@2172.92,1125.98
RELAY16: U2.16 U4.3 | length 611.5
  L1 w4: U2.16@2039.06,1631.93 2038,1630.87 2038,1510 2126,1422 2126,1107 2132.61,1100.39 U4.3@2172.92,1100.39
RELAY17: U2.15 U4.4 | length 655.1
  L1 w4: U2.15@2019.37,1631.93 2019.37,1471.63 2103,1388 2103,1086 2114.2,1074.8 U4.4@2172.92,1074.8
RELAY18: U2.14 U4.5 | length 700.8
  L1 w4: U2.14@1999.68,1631.93 1999.68,1603.24 2003,1599.93 2003,1442 2075,1370 2075,1068 2093.8,1049.2 U4.5@2172.92,1049.2
RELAY19: U2.13 U4.6 | length 747.7
  L1 w4: U2.13@1980,1631.93 1980,1603.24 1988,1595.24 1988,1427 2045,1370 2045,1050 2071.39,1023.61 U4.6@2172.92,1023.61
RELAY20: U2.12 U4.7 | length 788.7
  L1 w4: U2.12@1960.31,1631.93 1960.31,1588.69 1972,1577 1972,1403 2018,1357 2018,1039 2058.98,998.02 U4.7@2172.92,998.02
RST: J4.5 R1.1 U2.30 | length 2771.8
  L1 w4: v1(2217.48,1782.52) U2.30@2288.07,1782.52 ; R1.1@2387,1753.7 v1(2421.7,1753.7) ; v1(2670,1793) 2771,1894 2771,2350 2814,2393 2898,2393 2966,2461 2966,2655 3058,2747 v1(3058,3328)
  L4 w4: v1(2217.48,1782.52) 2219,1781 2394.4,1781 2421.3,1754.1 2421.3,1753.7 v1(2421.7,1753.7) 2630.7,1753.7 v1(2670,1793) ; v1(3058,3328) 3058,3459 3100.69,3501.69 J4.5@3349.92,3501.69
S: J1.43 J2.44 | length 156.4
  L1 w11.55: v1(1900,386.97) 1900.3,386.67 1900.3,310.56 J1.43@1900.35,310.51
  L3 w11.55: v1(1900,386.97) 1900,385.29 v1@1901,384.29
  L4 w4: v1(1900,386.97) v1@1900.18,386.79 ; J2.44@1900.18,310.69 J2.44@1900.35,310.51
  L4 w11.55: J2.44@1900.18,310.69 1900.18,362.07 1900.3,362.2 1900.3,386.67 v1@1900.18,386.79
SCK: J1.99 J4.3 U2.20 | length 6173.6
  L1 w4: v1(2117.8,1534.2) U2.20@2117.8,1631.93 ; J1.99@2451.54,310.51 2470,328.98 v1(2470,394)
  L3 w4: v1(2117.8,1534.2) v1@2118,1534
  L4 w4: v1(2117.8,1534.2) 2117.8,1379.21 2141,1356 2248,1356 2290,1314 2290,943 2470,763 v1(2470,394) 2505,359 3687,359 3700,372 3700,3243 3672,3271 3478,3271 3403,3346 3403,3454.77 J4.3@3449.92,3501.69
SCL: J1.8 J2.7 J5.5 U2.43 | length 5954.7
  L1 w4: v1(1008,376) 1040,376 1072,408 1072,957 1159,1044 v1(1159,1917) 1159,2005 1168,2014 1168,3067 v1(1252,3151) ; v1(1546.02,103.02) J1.8@1546.02,164.84 ; v1(2230,2039) 2288.07,2039 U2.43@2288.07,2038.43
  L4 w4: J5.5@786.57,3503.66 786.57,3565.57 798,3577 906,3577 941,3542 941,3262 990,3213 1190,3213 v1(1252,3151) ; v1(1008,376) 976,344 976,202 1105,73 1533,73 1546.02,86.02 v1(1546.02,103.02) J2.7@1546.02,164.84 ; v1(1159,1917) 2194,1917 2230,1953 v1(2230,2039)
SDA: J1.10 J2.9 J5.6 U2.44 | length 5915.8
  L1 w4: v1(896,3143) 895,3144 895,3172 915,3192 1042,3192 1072,3162 1072,3071 1059,3058 1059,2324 1050,2315 v1(1050,1923) 1050,1403 1123,1330 1123,1252 1062,1191 1062,1017 v1(1021,976) ; v1(1565.1,88.53) 1565.1,164.24 J1.10@1565.71,164.84 ; v1(2198,2056) 2288.63,2056 2288.63,2057.56 U2.44@2288.07,2058.11
  L4 w4: J5.6@886.57,3503.66 893.38,3496.86 893.38,3145.62 v1(896,3143) ; v1(1021,976) 1061,936 1061,438 1036,413 984,413 952.43,381.43 952.43,178.57 1066,65 1541.57,65 v1(1565.1,88.53) ; v1(1050,1923) 1126,1923 1145,1942 2166,1942 2198,1974 v1(2198,2056) ; v1@1565.71,87.92 J2.9@1565.71,164.84
SS: J1.100 U2.19 | length 2490.9
  L1 w4: v1(2097,1570) 2097.56,1570.56 2097.56,1630.26 2097,1630.82 U2.19@2098.11,1631.93 ; v1(2381,455) 2776,455 2803,482 2844,482 2871,455 2871,391 2850,370 2577,370 2553,346 2553,185 2523,155 2455.44,155 2451.54,158.91 J1.100@2451.54,164.84
  L4 w4: v1(2097,1570) 2097,1296 2212,1181 2212,900 2352,760 2352,484 v1(2381,455)
T: J1.45 J2.46 | length 116.9
  L1 w11.55: J1.45@1920.04,310.51 v1(1920.04,368.96)
  L4 w11.55: J2.46@1920.04,310.51 v1(1920.04,368.96)
U: J1.47 J2.48 | length 152.4
  L1 w11.55: J1.47@1939.72,310.51 v1(1939.72,386.72)
  L4 w11.55: J2.48@1939.72,310.51 v1(1939.72,386.72)
VIOB_RX: J1.14 J5.4 U2.2 | length 5494.8
  L1 w4: v1(839,3121) 839,3117 875,3081 875,2590 894,2571 894,1963 880,1949 880,1641 v1(865,1626) 864,1625 864,1285 917,1232 917,1071 883,1037 883,717 964,636 964,474 943,453 943,183 907,147 907,107 957,57 1573,57 1605.08,89.08 J1.14@1605.08,164.84 ; v1(1762,1548) 1762.73,1548.73 1762.73,1631.2 U2.2@1763.46,1631.93
  L4 w4: J5.4@686.57,3503.66 686.57,3373.43 717,3343 814,3343 863,3294 863,3131 853.86,3121.86 839.86,3121.86 v1(839,3121) ; v1(865,1626) 1281,1626 1359,1548 v1(1762,1548)
VIOB_TX: J1.12 J5.2 U2.3 | length 5693.9
  L1 w4: v1(836,3156) 907,3085 907,2626 930,2603 930,2361 965,2326 965,1976 906,1917 906,1616 v1(886,1596) 886,1290 932,1244 932,1062 899,1029 899,733 978,654 978,464 958,444 958,175 928,145 928,104 966,66 1565,66 1585.39,86.39 J1.12@1585.39,164.84 ; v1(1783,1521) 1783.07,1521.07 U2.3@1783.15,1631.93 U2.3@1783.15,1631.93
  L4 w4: J5.2@486.57,3503.66 486.57,3201.43 532,3156 v1(836,3156) ; v1(886,1596) 1270,1596 1345,1521 v1(1783,1521)
W: J1.49 J2.50 | length 120.2
  L1 w11.55: J1.49@1959.41,310.51 v1(1959.41,370.59)
  L4 w11.55: J2.50@1959.41,310.51 v1(1959.41,370.59)
X: J1.51 J2.52 | length 152.8
  L1 w11.55: J1.51@1979.09,310.51 v1(1979.09,386.91)
  L4 w11.55: J2.52@1979.09,310.51 v1(1979.09,386.91)
X1: J1.57 J1.59 J1.61 J2.58 J2.60 J2.62 | length 78.7
  L1 w4: J1.57@2038.15,310.51 J1.59@2057.83,310.51 J1.61@2077.52,310.51
  L4 w4: J2.58@2038.15,310.51 J2.60@2057.83,310.51 J2.62@2077.52,310.51
  other v1: 2047,238 2071,238 2058,260 2058,365 2069,384 2046,385
X2: J1.63 J2.64 | length 146.6
  L1 w10: J1.63@2097.2,310.51 v1(2097.2,383.8)
  L4 w11.55: J2.64@2097.2,310.51 v1(2097.2,383.8)
X3: J1.65 J2.66 | length 115.2
  L1 w10: J1.65@2116.89,310.51 v1(2116.89,368.11)
  L4 w11.55: J2.66@2116.89,310.51 v1(2116.89,368.11)
X4: J1.75 J2.76 | length 149.2
  L1 w10: v1(2215,385) 2215,310.83 J1.75@2215.32,310.51
  L4 w4: v1(2215,385) v1@2215.16,384.84 ; J2.76@2215.16,310.67 J2.76@2215.32,310.51
  L4 w10: J2.76@2215.16,310.67 v1@2215.16,384.84
X5: J1.77 J2.78 | length 113
  L1 w10: J1.77@2235,310.51 v1(2235,367)
  L4 w10: J2.78@2235,310.51 v1(2235,367)
X6: J1.79 J2.80 | length 150.3
  L1 w10: J1.79@2254.69,310.51 v1(2254.69,385.69)
  L4 w10: J2.80@2254.69,310.51 v1(2254.69,385.69)
X7: J1.81 J2.82 | length 114.2
  L1 w10: J1.81@2274.37,310.51 v1(2274.37,367.63)
  L4 w10: J2.82@2274.37,310.51 v1(2274.37,367.63)
X8: J1.83 J2.84 | length 147.1
  L1 w10: J1.83@2294.06,310.51 v1(2294.06,384.06)
  L4 w10: J2.84@2294.06,310.51 v1(2294.06,384.06)
Y: J1.53 J2.54 | length 121.4
  L1 w11.55: J1.53@1998.78,310.51 v1(1998.78,371.22)
  L4 w11.55: J2.54@1998.78,310.51 v1(1998.78,371.22)
Z: J1.55 J2.56 | length 150
  L1 w11.55: J1.55@2018.46,310.51 v1(2018.46,385.54)
  L4 w11.55: J2.56@2018.46,310.51 v1(2018.46,385.54)
pads on no net: FD1.0 FD2.0 FD3.0 J1. J1.16 J1.18 J1.20 J1.22 J1.24 J1.26 J1.28 J1.30 J1.32 J1.34 J1.36 J1.38 J1.40 J1.42 J1.44 J1.46 J1.48 J1.50 J1.52 J1.54 J1.56 J1.58 J1.60 J1.62 J1.64 J1.66 J1.68 J1.70 J1.72 J1.74 J1.76 J1.78 J1.80 J1.82 J1.84 J1.86 J1.88 J1.90 J1.92 J1.94 J1.96 J1.98 J2. J2.11 J2.13 J2.15 J2.17 J2.19 J2.21 J2.23 J2.25 J2.27 J2.29 J2.31 J2.33 J2.35 J2.37 J2.39 J2.41 J2.43 J2.45 J2.47 J2.49 J2.51 J2.53 J2.55 J2.57 J2.59 J2.61 J2.63 J2.65 J2.67 J2.69 J2.71 J2.73 J2.75 J2.77 J2.79 J2.81 J2.83 J2.85 J2.87 J2.89 J2.91 J2.93 J2.95 J2.96 J2.97 J2.98 J2.99 J2.100 J3. J3.22 J3.24 J3.26 J3.28 J3.30 J3.32 J3.34 J3.36 J3.37 J3.38 J3.39 J3.40 J3.41 J3.42 J3.43 J3.44 J3.45 J3.46 J3.47 J3.48 J3.49 J3.50 J3.51 J3.52 J3.53 J3.54 J3.55 J3.56 J3.57 J3.58 J3.59 J3.60 J3.61 J3.63 J3.65 J3.67 J3.69 J3.71 J3.73 J3.75 J3.77 J3.79 J3.81

## Polygon pours and split planes (outlines as drawn)
GND on L1 "GND_L01_P004" (solid, pour order 4): 1480,187 1480,153 1480,82 1535,82 1535,187
+5V on L1 "+5V_L01_P003" (solid, pour order 3): 1480,409 1480,226 1531,226 1531,409
GND on L1 "GND_L01_P002" (solid, pour order 2): 2305,398 2305,396 2305,223 2402,223 2402,226 2402,398
GND on L1 "GND_L01_P001" (solid, pour order 1): 2149,313 2150,314 2150,397 2203,397 2203,223 2150,223 2150,257 2150,315
X1 on L1 "X1_L01_P000" (solid, pour order 0): 2033,221 2033,398 2085,398 2085,221
+5V on L3 "+5V_L03_P013" (solid, pour order 13): 0.25,3937.26 3937.26,3937.26 3937.26,0.25 3937.01,0 0,0
GND on L3 "GND_L03_P006" (solid, pour order 6): 1532,239 1532,443 1553,464 2009,464 2032,441 2032,238
GND on L4 "GND_L04_P011" (solid, pour order 11): 2305,398 2305,223 2401,223 2402,223 2402,398
GND on L4 "GND_L04_P010" (solid, pour order 10): 2150,397 2149,396 2149,223 2203,223 2203,397
X1 on L4 "X1_L04_P009" (solid, pour order 9): 2033,398 2032,397 2032,225 2039,218 2082,218 2087,223 2087,395 2087,396 2084,398
+5V on L4 "+5V_L04_P008" (solid, pour order 8): 1480,409 1480,226 1531,226 1531,409
GND on L4 "GND_L04_P007" (solid, pour order 7): 1480,196 1480,195 1480,82 1535,82 1535,196
GND on L2 (split plane): 3917.16,20.35 20.35,20.35 20.35,3917.16 3917.16,3917.16

## Keep-outs
Keep-Out Layer:
  the board outline again, w4

## Silkscreen, mask and mechanical layers (free items; w line width, h text height)
Top Overlay:
  text "DEBUG" at 1258.54,3908.68 h60 r180
  text "PROGRAMMER" at 3250.32,3899.18 h60 r180
  text "R" at 2854.68,3886.71 h472.44 r180
  text "POWER" at 2583,3802 h60 r180
  text "COMMAND" at 2101.8,3800.74 h60 r180
  text "ALARM" at 1549.61,3799.74 h60 r180
  text "e" at 3084.84,3742.16 h236.22 r180
  text "b" at 3093,3624.9 h393.7 r180
  text "W" at 2820,3533 h236.22 r180
  text "ionosens" at 2355.75,3300.87 h98.43 r180
  text "UNED" at 2111.21,3139.64 h98.43 r180
  text "CH2" at 35.32,2944.54 h60 r270
  text "CH1" at 23,1044 h60 r270
  text "VIOB" at 2151,822 h98.43 r180
  text "VIOB" at 2220,701 h78.74 r180
Mechanical 1:
  lines w0.5: 0.25,0.25 0.25,3937.26 3937.26,3937.26 3937.26,0.25 0.25,0.25
  lines w10: 0,3936 1,3937

## Text inside footprints (layer, text, board x,y; h text height)
J1: Mechanical 15 "1" at 1499.57,402.24 h39.37 r180; Mechanical 15 "2" at 1499.57,107.36 h39.37 r180
J2: Mechanical 15 "1" at 1499.57,73.11 h39.37; Mechanical 15 "2" at 1499.57,367.99 h39.37
J3: Mechanical 15 "1" at 1499.57,3658.15 h39.37 r180; Mechanical 15 "2" at 1499.57,3363.27 h39.37 r180
J4: Top Overlay "1" at 3671.58,3526.69 h50 r180; Top Overlay "5" at 3268.78,3526.69 h50 r180; Top Overlay "6" at 3268.78,3426.69 h50 r180; Top Overlay "2" at 3671.58,3426.69 h50 r180; Mechanical 13 "1" at 3671.58,3526.69 h50 r180; Mechanical 13 "2" at 3671.58,3426.69 h50 r180; Mechanical 13 "5" at 3268.78,3526.69 h50 r180; Mechanical 13 "6" at 3268.78,3426.69 h50 r180
J5: Top Overlay "6" at 967.72,3478.66 h50; Top Overlay "1" at 264.92,3478.66 h50; Mechanical 13 "6" at 967.72,3478.66 h50; Mechanical 13 "1" at 264.92,3478.66 h50